# EAGLE board AutoSpielSimplified 3 FEDC DRU (EAGLE 9.2.0)
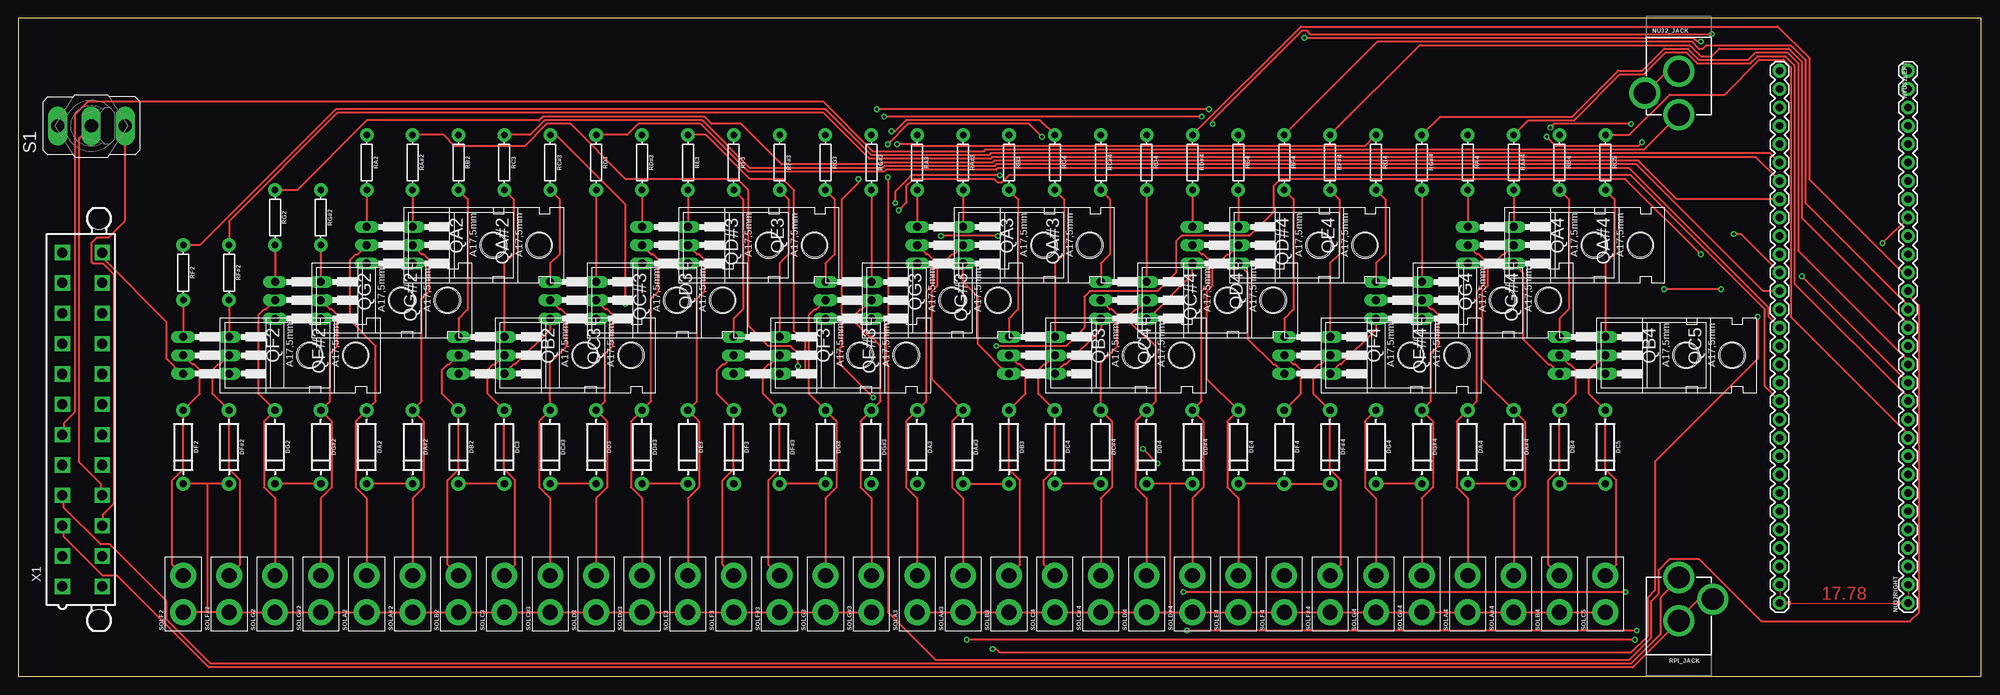
[diagram p0: board, top side]
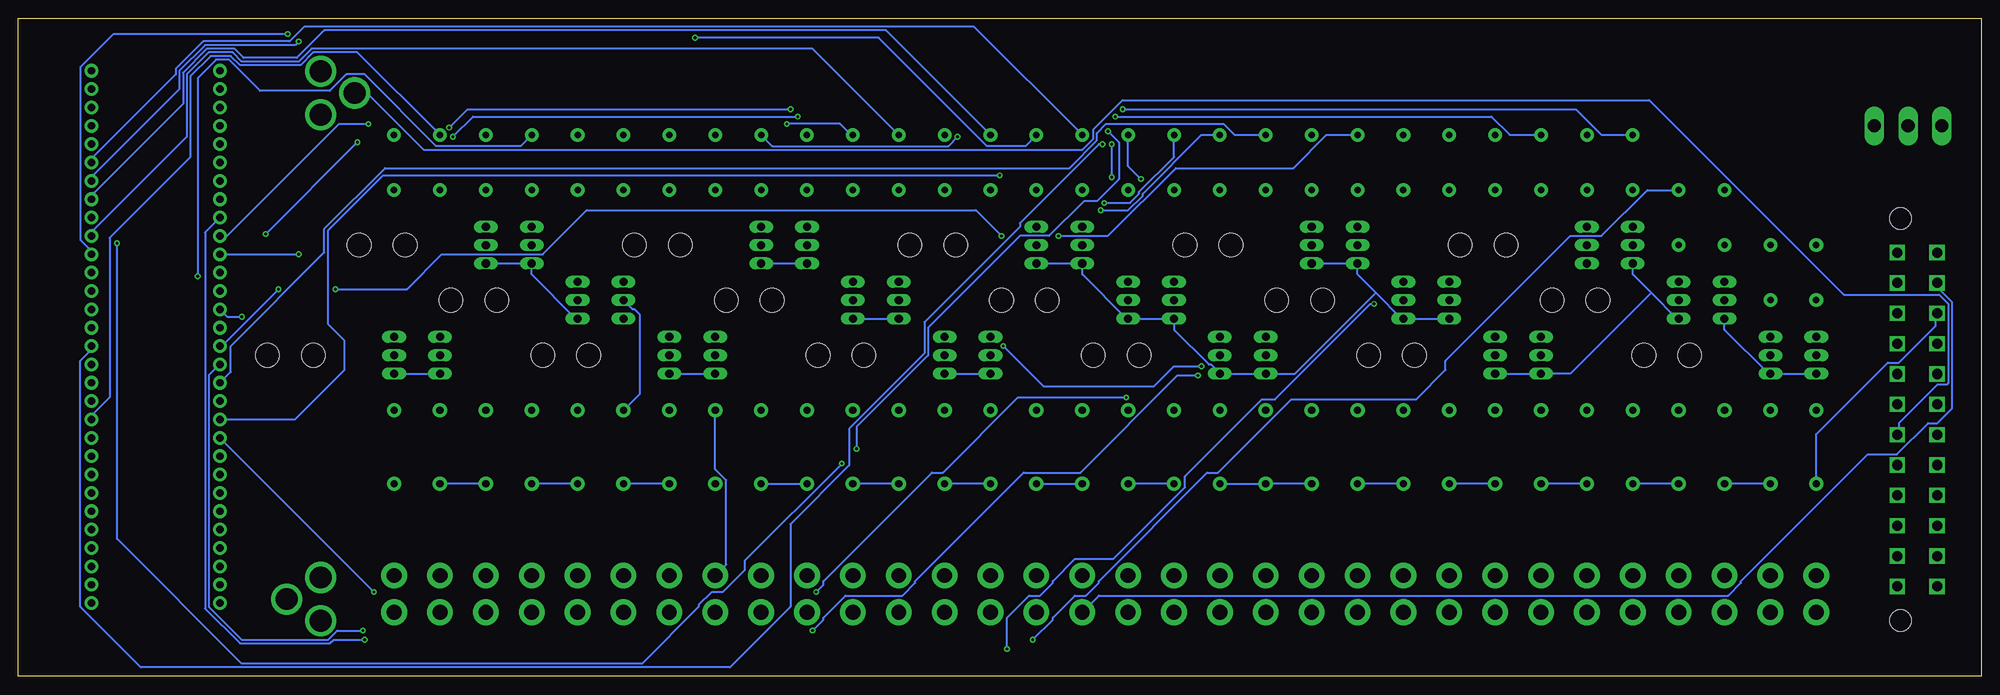
[diagram p1: board, bottom side, seen from below]

Size 271.76 x 91.11 mm. Coordinates in mm from the lower left corner, seen from the top.
Outline: 0,0 271.76,0 271.76,91.11 0,91.11 0,0
Copper layers (1*16): Top 0.035mm / dielectric 1.5mm / Bottom 0.035mm
Design rules "Standard": minimum track width 10mil, minimum drill 15mil, track to track 10mil, track to pad 10mil, pad to pad 10mil, via to via 10mil, smd to smd 10mil, copper to edge 40mil, drill to drill 10mil, minimum pad ring 8mil, minimum via ring 8mil, stop-mask expansion 4mil, vias tented up to drill 0mil, thermal gap 10mil

## Footprints (pad centres in the part's own frame; a part is rotated, then mirrored left to right if it is on the bottom)
DIODE-1N4001 = drill 1 pad 1.981: A -5.08,0; C 5.08,0
POWER_JACK_PTH = drill 2.997 pad 4.318: GND 0,7.7; GNDBREAK 4.7,10.7; PWR 0,13.7
1X30 = drill 1.016 pad 1.88: 1 0,0; 2 2.54,0; 3 5.08,0; 4 7.62,0; 5 10.16,0; 6 12.7,0; 7 15.24,0; 8 17.78,0; 9 20.32,0; 10 22.86,0; 11 25.4,0; 12 27.94,0; 13 30.48,0; 14 33.02,0; 15 35.56,0; 16 38.1,0; 17 40.64,0; 18 43.18,0; 19 45.72,0; 20 48.26,0; 21 50.8,0; 22 53.34,0; 23 55.88,0; 24 58.42,0; 25 60.96,0; 26 63.5,0; 27 66.04,0; 28 68.58,0; 29 71.12,0; 30 73.66,0
TO220AH = drill 1.118 long: B -2.54,-6.35; C 0,-6.35; E 2.54,-6.35 | hole 3.302: 0,11.176
AXIAL-0.3 = drill 0.9 pad 1.88: P$1 -3.81,0; P$2 3.81,0
M9040P = drill 1.803 long: 1 0,4.699; 2 0,0; 3 0,-4.699
1X02_XTRA_BIG = drill 2.057 pad 3.556: 1 -2.54,0; 2 2.54,0
5566-24 = drill 1.4 square: 1 23.1,-2.75; 2 18.9,-2.75; 3 14.7,-2.75; 4 10.5,-2.75; 5 6.3,-2.75; 6 2.1,-2.75; 7 -2.1,-2.75; 8 -6.3,-2.75; 9 -10.5,-2.75; 10 -14.7,-2.75; 11 -18.9,-2.75; 12 -23.1,-2.75; 13 23.1,2.75; 14 18.9,2.75; 15 14.7,2.75; 16 10.5,2.75; 17 6.3,2.75; 18 2.1,2.75; 19 -2.1,2.75; 20 -6.3,2.75; 21 -10.5,2.75; 22 -14.7,2.75; 23 -18.9,2.75; 24 -23.1,2.75 | hole 3: 27.8,2.29; -27.8,2.29

## Placement (x,y rotation side)
DA2  1A/50V/1.1V  [DIODE-1N4001]  48.26,31.75 270 top
DA3  1A/50V/1.1V  [DIODE-1N4001]  124.46,31.75 270 top
DA4  1A/50V/1.1V  [DIODE-1N4001]  200.66,31.75 270 top
DA#2  1A/50V/1.1V  [DIODE-1N4001]  54.61,31.75 270 top
DA#3  1A/50V/1.1V  [DIODE-1N4001]  130.81,31.75 270 top
DA#4  1A/50V/1.1V  [DIODE-1N4001]  207.01,31.75 270 top
DB2  1A/50V/1.1V  [DIODE-1N4001]  60.96,31.75 270 top
DB3  1A/50V/1.1V  [DIODE-1N4001]  137.16,31.75 270 top
DB4  1A/50V/1.1V  [DIODE-1N4001]  213.36,31.75 270 top
DC3  1A/50V/1.1V  [DIODE-1N4001]  67.31,31.75 270 top
DC4  1A/50V/1.1V  [DIODE-1N4001]  143.51,31.75 270 top
DC5  1A/50V/1.1V  [DIODE-1N4001]  219.71,31.75 270 top
DC#3  1A/50V/1.1V  [DIODE-1N4001]  73.66,31.75 270 top
DC#4  1A/50V/1.1V  [DIODE-1N4001]  149.86,31.75 270 top
DD3  1A/50V/1.1V  [DIODE-1N4001]  80.01,31.75 270 top
DD4  1A/50V/1.1V  [DIODE-1N4001]  156.21,31.75 270 top
DD#3  1A/50V/1.1V  [DIODE-1N4001]  86.36,31.75 270 top
DD#4  1A/50V/1.1V  [DIODE-1N4001]  162.56,31.75 270 top
DE3  1A/50V/1.1V  [DIODE-1N4001]  92.71,31.75 270 top
DE4  1A/50V/1.1V  [DIODE-1N4001]  168.91,31.75 270 top
DF2  1A/50V/1.1V  [DIODE-1N4001]  22.86,31.75 270 top
DF3  1A/50V/1.1V  [DIODE-1N4001]  99.06,31.75 270 top
DF4  1A/50V/1.1V  [DIODE-1N4001]  175.26,31.75 270 top
DF#2  1A/50V/1.1V  [DIODE-1N4001]  29.21,31.75 270 top
DF#3  1A/50V/1.1V  [DIODE-1N4001]  105.41,31.75 270 top
DF#4  1A/50V/1.1V  [DIODE-1N4001]  181.61,31.75 270 top
DG2  1A/50V/1.1V  [DIODE-1N4001]  35.56,31.75 270 top
DG3  1A/50V/1.1V  [DIODE-1N4001]  111.76,31.75 270 top
DG4  1A/50V/1.1V  [DIODE-1N4001]  187.96,31.75 270 top
DG#2  1A/50V/1.1V  [DIODE-1N4001]  41.91,31.75 270 top
DG#3  1A/50V/1.1V  [DIODE-1N4001]  118.11,31.75 270 top
DG#4  1A/50V/1.1V  [DIODE-1N4001]  194.31,31.75 270 top
NU32_JACK  POWER_JACK  [POWER_JACK_PTH]  229.87,91.44 180 top
NU32RIGHT  [1X30]  261.62,10.16 90 top
NYU32LEFT  [1X30]  243.84,10.16 90 top
QA2  TIP120  [TO220AH]  54.61,59.69 270 top
QA3  TIP120  [TO220AH]  130.81,59.69 270 top
QA4  TIP120  [TO220AH]  207.01,59.69 270 top
QA#2  TIP120  [TO220AH]  60.96,59.69 270 top
QA#3  TIP120  [TO220AH]  137.16,59.69 270 top
QA#4  TIP120  [TO220AH]  213.36,59.69 270 top
QB2  TIP120  [TO220AH]  67.31,44.45 270 top
QB3  TIP120  [TO220AH]  143.51,44.45 270 top
QB4  TIP120  [TO220AH]  219.71,44.45 270 top
QC3  TIP120  [TO220AH]  73.66,44.45 270 top
QC4  TIP120  [TO220AH]  149.86,44.45 270 top
QC5  TIP120  [TO220AH]  226.06,44.45 270 top
QC#3  TIP120  [TO220AH]  80.01,52.07 270 top
QC#4  TIP120  [TO220AH]  156.21,52.07 270 top
QD3  TIP120  [TO220AH]  86.36,52.07 270 top
QD4  TIP120  [TO220AH]  162.56,52.07 270 top
QD#3  TIP120  [TO220AH]  92.71,59.69 270 top
QD#4  TIP120  [TO220AH]  168.91,59.69 270 top
QE3  TIP120  [TO220AH]  99.06,59.69 270 top
QE4  TIP120  [TO220AH]  175.26,59.69 270 top
QF2  TIP120  [TO220AH]  29.21,44.45 270 top
QF3  TIP120  [TO220AH]  105.41,44.45 270 top
QF4  TIP120  [TO220AH]  181.61,44.45 270 top
QF#2  TIP120  [TO220AH]  35.56,44.45 270 top
QF#3  TIP120  [TO220AH]  111.76,44.45 270 top
QF#4  TIP120  [TO220AH]  187.96,44.45 270 top
QG2  TIP120  [TO220AH]  41.91,52.07 270 top
QG3  TIP120  [TO220AH]  118.11,52.07 270 top
QG4  TIP120  [TO220AH]  194.31,52.07 270 top
QG#2  TIP120  [TO220AH]  48.26,52.07 270 top
QG#3  TIP120  [TO220AH]  124.46,52.07 270 top
QG#4  TIP120  [TO220AH]  200.66,52.07 270 top
RA2  1k  [AXIAL-0.3]  48.26,71.12 270 top
RA3  1k  [AXIAL-0.3]  124.46,71.12 270 top
RA4  1k  [AXIAL-0.3]  200.66,71.12 270 top
RA#2  1k  [AXIAL-0.3]  54.61,71.12 270 top
RA#3  1k  [AXIAL-0.3]  130.81,71.12 270 top
RA#4  1k  [AXIAL-0.3]  207.01,71.12 270 top
RB2  1k  [AXIAL-0.3]  60.96,71.12 270 top
RB3  1k  [AXIAL-0.3]  137.16,71.12 270 top
RB4  1k  [AXIAL-0.3]  213.36,71.12 270 top
RC3  1k  [AXIAL-0.3]  67.31,71.12 270 top
RC4  1k  [AXIAL-0.3]  143.51,71.12 270 top
RC5  1k  [AXIAL-0.3]  219.71,71.12 270 top
RC#3  1k  [AXIAL-0.3]  73.66,71.12 270 top
RC#4  1k  [AXIAL-0.3]  149.86,71.12 270 top
RD3  1k  [AXIAL-0.3]  80.01,71.12 270 top
RD4  1k  [AXIAL-0.3]  156.21,71.12 270 top
RD#3  1k  [AXIAL-0.3]  86.36,71.12 270 top
RD#4  1k  [AXIAL-0.3]  162.56,71.12 270 top
RE3  1k  [AXIAL-0.3]  92.71,71.12 270 top
RE4  1k  [AXIAL-0.3]  168.91,71.12 270 top
RF2  1k  [AXIAL-0.3]  22.86,55.88 270 top
RF3  1k  [AXIAL-0.3]  99.06,71.12 270 top
RF4  1k  [AXIAL-0.3]  175.26,71.12 270 top
RF#2  1k  [AXIAL-0.3]  29.21,55.88 270 top
RF#3  1k  [AXIAL-0.3]  105.41,71.12 270 top
RF#4  1k  [AXIAL-0.3]  181.61,71.12 270 top
RG2  1k  [AXIAL-0.3]  35.56,63.5 270 top
RG3  1k  [AXIAL-0.3]  111.76,71.12 270 top
RG4  1k  [AXIAL-0.3]  187.96,71.12 270 top
RG#2  1k  [AXIAL-0.3]  41.91,63.5 270 top
RG#3  1k  [AXIAL-0.3]  118.11,71.12 270 top
RG#4  1k  [AXIAL-0.3]  194.31,71.12 270 top
RPI_JACK  POWER_JACK  [POWER_JACK_PTH]  229.87,0 0 top
S1  [M9040P]  10.16,76.2 90 top
SOLA2  [1X02_XTRA_BIG]  48.26,11.43 90 top
SOLA3  [1X02_XTRA_BIG]  124.46,11.43 90 top
SOLA4  [1X02_XTRA_BIG]  200.66,11.43 90 top
SOLA#2  [1X02_XTRA_BIG]  54.61,11.43 90 top
SOLA#3  [1X02_XTRA_BIG]  130.81,11.43 90 top
SOLA#4  [1X02_XTRA_BIG]  207.01,11.43 90 top
SOLB2  [1X02_XTRA_BIG]  60.96,11.43 90 top
SOLB3  [1X02_XTRA_BIG]  137.16,11.43 90 top
SOLB4  [1X02_XTRA_BIG]  213.36,11.43 90 top
SOLC3  [1X02_XTRA_BIG]  67.31,11.43 90 top
SOLC4  [1X02_XTRA_BIG]  143.51,11.43 90 top
SOLC5  [1X02_XTRA_BIG]  219.71,11.43 90 top
SOLC#3  [1X02_XTRA_BIG]  73.66,11.43 90 top
SOLC#4  [1X02_XTRA_BIG]  149.86,11.43 90 top
SOLD3  [1X02_XTRA_BIG]  80.01,11.43 90 top
SOLD4  [1X02_XTRA_BIG]  156.21,11.43 90 top
SOLD#3  [1X02_XTRA_BIG]  86.36,11.43 90 top
SOLD#4  [1X02_XTRA_BIG]  162.56,11.43 90 top
SOLE3  [1X02_XTRA_BIG]  92.71,11.43 90 top
SOLE4  [1X02_XTRA_BIG]  168.91,11.43 90 top
SOLF2  [1X02_XTRA_BIG]  22.86,11.43 90 top
SOLF3  [1X02_XTRA_BIG]  99.06,11.43 90 top
SOLF4  [1X02_XTRA_BIG]  175.26,11.43 90 top
SOLF#2  [1X02_XTRA_BIG]  29.21,11.43 90 top
SOLF#3  [1X02_XTRA_BIG]  105.41,11.43 90 top
SOLF#4  [1X02_XTRA_BIG]  181.61,11.43 90 top
SOLG2  [1X02_XTRA_BIG]  35.56,11.43 90 top
SOLG3  [1X02_XTRA_BIG]  111.76,11.43 90 top
SOLG4  [1X02_XTRA_BIG]  187.96,11.43 90 top
SOLG#2  [1X02_XTRA_BIG]  41.91,11.43 90 top
SOLG#3  [1X02_XTRA_BIG]  118.11,11.43 90 top
SOLG#4  [1X02_XTRA_BIG]  194.31,11.43 90 top
X1  5566-24  [5566-24]  8.89,35.56 270 top

## Library data of the parts
DA2-DA4 DA#2-DA#4 DB2-DB4 DC3-DC5 DC#3 DC#4 DD3 DD4 DD#3 DD#4 DE3 DE4 DF2-DF4 DF#2-DF#4 DG2-DG4 DG#2-DG#4 = SparkFun-DiscreteSemi; PROD_ID: DIO-09176
NU32_JACK RPI_JACK = SparkFun-Connectors; PROD_ID: CONN-08197
NU32RIGHT NYU32LEFT SOLA2-SOLA4 SOLA#2-SOLA#4 SOLB2-SOLB4 SOLC3-SOLC5 SOLC#3 SOLC#4 SOLD3 SOLD4 SOLD#3 SOLD#4 SOLE3 SOLE4 SOLF2-SOLF4 SOLF#2-SOLF#4 SOLG2-SOLG4 SOLG#2-SOLG#4 = SparkFun-Connectors
QA2-QA4 QA#2-QA#4 QB2-QB4 QC3-QC5 QC#3 QC#4 QD3 QD4 QD#3 QD#4 QE3 QE4 QF2-QF4 QF#2-QF#4 QG2-QG4 QG#2-QG#4 = transistor-power
RA2-RA4 RA#2-RA#4 RB2-RB4 RC3-RC5 RC#3 RC#4 RD3 RD4 RD#3 RD#4 RE3 RE4 RF2-RF4 RF#2-RF#4 RG2-RG4 RG#2-RG#4 = SparkFun-Resistors; PROD_ID: RES-08380
S1 = switch
X1 = con-molex; MF: MOLEX; OC_FARNELL: unknown; OC_NEWARK: unknown

## Nets
A2: NYU32LEFT.21 RA2.P$1
A3: NU32RIGHT.25 RA3.P$1
A4: NU32RIGHT.13 RA4.P$1
A#2: NYU32LEFT.20 RA#2.P$1
A#3: NU32RIGHT.24 RA#3.P$1
A#4: NU32RIGHT.12 RA#4.P$1
B2: NYU32LEFT.19 RB2.P$1
B3: NU32RIGHT.23 RB3.P$1
B4: NU32RIGHT.11 RB4.P$1
C3: NYU32LEFT.18 RC3.P$1
C4: NU32RIGHT.22 RC4.P$1
C5: NU32RIGHT.10 RC5.P$1
C#3: NYU32LEFT.17 RC#3.P$1
C#4: NU32RIGHT.21 RC#4.P$1
D3: NYU32LEFT.16 RD3.P$1
D4: NU32RIGHT.20 RD4.P$1
D#3: NYU32LEFT.15 RD#3.P$1
D#4: NU32RIGHT.19 RD#4.P$1
E3: NYU32LEFT.14 RE3.P$1
E4: NU32RIGHT.18 RE4.P$1
F2: NYU32LEFT.25 RF2.P$1
F3: NYU32LEFT.13 RF3.P$1
F4: NU32RIGHT.17 RF4.P$1
F#2: NYU32LEFT.24 RF#2.P$1
F#3: NYU32LEFT.12 RF#3.P$1
F#4: NU32RIGHT.16 RF#4.P$1
G2: NYU32LEFT.23 RG2.P$1
G3: NYU32LEFT.11 RG3.P$1
G4: NU32RIGHT.15 RG4.P$1
G#2: NYU32LEFT.22 RG#2.P$1
G#3: NYU32LEFT.10 RG#3.P$1
G#4: NU32RIGHT.14 RG#4.P$1
GND: QA2.E QA3.E QA4.E QA#2.E QA#3.E QA#4.E QB2.E QB3.E QB4.E QC3.E QC4.E QC5.E QC#3.E QC#4.E QD3.E QD4.E QD#3.E QD#4.E QE3.E QE4.E QF2.E QF3.E QF4.E QF#2.E QF#3.E QF#4.E QG2.E QG3.E QG4.E QG#2.E QG#3.E QG#4.E X1.24
N$1: QF2.B RF2.P$2
N$2: QC#3.B RC#3.P$2
N$3: DF2.A QF2.C SOLF2.2
N$4: QF#2.B RF#2.P$2
N$5: DF#2.A QF#2.C SOLF#2.2
N$6: DC#3.A QC#3.C SOLC#3.2
N$7: QG2.B RG2.P$2
N$8: DG2.A QG2.C SOLG2.2
N$9: QD3.B RD3.P$2
N$10: QG#2.B RG#2.P$2
N$11: DG#2.A QG#2.C SOLG#2.2
N$12: DD3.A QD3.C SOLD3.2
N$13: QA2.B RA2.P$2
N$14: DA2.A QA2.C SOLA2.2
N$15: QD#3.B RD#3.P$2
N$16: QA#2.B RA#2.P$2
N$17: DA#2.A QA#2.C SOLA#2.2
N$18: DD#3.A QD#3.C SOLD#3.2
N$19: QB2.B RB2.P$2
N$20: DB2.A QB2.C SOLB2.2
N$21: QE3.B RE3.P$2
N$22: QC3.B RC3.P$2
N$23: DC3.A QC3.C SOLC3.2
N$24: DE3.A QE3.C SOLE3.2
N$25: QA3.B RA3.P$2
N$26: DA3.A QA3.C SOLA3.2
N$27: QF3.B RF3.P$2
N$28: DF3.A QF3.C SOLF3.2
N$29: QF#3.B RF#3.P$2
N$30: DF#3.A QF#3.C SOLF#3.2
N$31: QG3.B RG3.P$2
N$32: DG3.A QG3.C SOLG3.2
N$33: QG#3.B RG#3.P$2
N$34: DG#3.A QG#3.C SOLG#3.2
N$35: QF4.B RF4.P$2
N$36: DF4.A QF4.C SOLF4.2
N$37: QF#4.B RF#4.P$2
N$38: DF#4.A QF#4.C SOLF#4.2
N$39: QG4.B RG4.P$2
N$40: DG4.A QG4.C SOLG4.2
N$41: QG#4.B RG#4.P$2
N$42: DG#4.A QG#4.C SOLG#4.2
N$43: QA4.B RA4.P$2
N$44: DA4.A QA4.C SOLA4.2
N$45: QA#4.B RA#4.P$2
N$46: DA#4.A QA#4.C SOLA#4.2
N$47: QB4.B RB4.P$2
N$48: DB4.A QB4.C SOLB4.2
N$49: QC5.B RC5.P$2
N$50: DC5.A QC5.C SOLC5.2
N$52: QA#3.B RA#3.P$2
N$53: DA#3.A QA#3.C SOLA#3.2
N$55: QB3.B RB3.P$2
N$56: DB3.A QB3.C SOLB3.2
N$57: S1.1
N$58: QC4.B RC4.P$2
N$59: DC4.A QC4.C SOLC4.2
N$61: QC#4.B RC#4.P$2
N$62: DC#4.A QC#4.C SOLC#4.2
N$64: QD4.B RD4.P$2
N$65: DD4.A QD4.C SOLD4.2
N$67: QD#4.B RD#4.P$2
N$68: DD#4.A QD#4.C SOLD#4.2
N$70: QE4.B RE4.P$2
N$71: DE4.A QE4.C SOLE4.2
NU32GND: NU32_JACK.GND NU32_JACK.GNDBREAK X1.18
NU32PWR: NU32_JACK.PWR X1.6
PS_ON: S1.2 X1.16
PS_ONGND: S1.3 X1.15
RPI_GND: RPI_JACK.GND RPI_JACK.GNDBREAK X1.3
RPI_PWR: RPI_JACK.PWR X1.4
VDD1: DA2.C DA#2.C DB2.C DC3.C DC#3.C DD3.C DD#3.C DE3.C DF2.C DF3.C DF#2.C DF#3.C DG2.C DG3.C DG#2.C DG#3.C SOLA2.1 SOLA#2.1 SOLB2.1 SOLC3.1 SOLC#3.1 SOLD3.1 SOLD#3.1 SOLE3.1 SOLF2.1 SOLF3.1 SOLF#2.1 SOLF#3.1 SOLG2.1 SOLG3.1 SOLG#2.1 SOLG#3.1 X1.10
VDD2: DA3.C DA4.C DA#3.C DA#4.C DB3.C DB4.C DC4.C DC5.C DC#4.C DD4.C DD#4.C DE4.C DF4.C DF#4.C DG4.C DG#4.C SOLA3.1 SOLA4.1 SOLA#3.1 SOLA#4.1 SOLB3.1 SOLB4.1 SOLC4.1 SOLC5.1 SOLC#4.1 SOLD4.1 SOLD#4.1 SOLE4.1 SOLF4.1 SOLF#4.1 SOLG4.1 SOLG#4.1 X1.11

## Tracks (layer width: path | path; a pad name or v marks a point on that pad's centre or on a via)
A2  (via drill 0.38)
  Top 0.254: v164.85,78.49 v118.87,78.49 | v212.09,75.95 212.6,76.45 v223.27,76.45
  Bottom 0.254: RA2.P$1 52.58,74.93 56.13,78.49 v118.87,78.49 | v164.85,78.49 209.55,78.49 v212.09,75.95 | v223.27,76.45 227.33,76.45 242.82,60.96 NYU32LEFT.21
A3
  Bottom 0.254: NU32RIGHT.25 261.62,71.63 249.94,83.31 249.94,84.07 246.13,87.88 234.19,87.88 232.16,89.92 139.45,89.92 RA3.P$1
A4  (via drill 0.38)
  Top 0.254: v246.89,55.37 NU32RIGHT.13
  Bottom 0.254: v246.89,55.37 246.89,82.8 244.35,85.34 242.57,85.34 238.25,81.03 228.6,81.03 226.31,83.31 223.77,83.31 213.87,73.41 202.18,73.41 RA4.P$1
A#2  (via drill 0.38)
  Top 0.254: RA#2.P$1 58.93,74.93 60.45,73.41 70.1,73.41 73.15,76.45 76.45,76.45 84.07,68.83 99.57,68.83 101.09,67.31 101.09,48.51 103.89,45.72 106.93,45.72 107.95,44.7 v107.95,42.93 | v135.38,45.72 145.03,45.72 147.57,48.26 147.57,52.58 148.34,53.34 157.73,53.34 160.27,55.88 160.27,60.2 161.04,60.96 170.43,60.96 173.74,64.26 173.74,67.82 174.75,68.83 222.5,68.83 v232.92,58.42
  Bottom 0.254: v107.95,42.93 111.76,42.93 114.55,40.13 129.79,40.13 v135.38,45.72 | NYU32LEFT.20 v232.92,58.42
A#3  (via drill 0.38)
  Top 0.254: v232.92,87.88 232.41,87.88 231.9,88.39 v178.05,88.39
  Bottom 0.254: NU32RIGHT.24 261.62,69.09 249.43,81.28 249.43,83.82 245.87,87.38 233.43,87.38 v232.92,87.88 | v178.05,88.39 152.65,88.39 137.67,73.41 132.33,73.41 RA#3.P$1
A#4
  Top 0.254: NU32RIGHT.12 261.62,38.61 245.87,54.36 245.87,84.58 244.6,85.85 240.79,85.85 239.78,84.84 232.41,84.84 230.89,86.36 228.09,86.36 225.04,83.31 221.74,83.31 215.39,76.96 209.04,76.96 RA#4.P$1
B2  (via drill 0.38)
  Top 0.254: v163.83,77.47 v119.89,77.47 | v211.58,74.68 212.85,73.41 224.28,73.41 v224.79,73.91 | v237.49,61.21 238.51,61.21 NYU32LEFT.19
  Bottom 0.254: RB2.P$1 65.28,74.93 67.82,77.47 v119.89,77.47 | v163.83,77.47 208.79,77.47 v211.58,74.68 | v237.49,61.21 v224.79,73.91
B3
  Bottom 0.254: NU32RIGHT.23 261.62,66.55 248.92,79.25 248.92,83.57 245.62,86.87 241.81,86.87 240.54,85.6 233.17,85.6 229.36,89.41 151.64,89.41 RB3.P$1
B4
  Bottom 0.254: NU32RIGHT.11 261.62,36.07 259.08,38.61 259.08,60.71 247.9,71.88 247.9,83.06 245.11,85.85 242.32,85.85 241.05,84.58 232.66,84.58 230.89,86.36 224.79,86.36 RB4.P$1
C3
  Top 0.254: RC3.P$1 70.87,74.93 72.9,76.96 94.74,76.96 101.35,70.36 119.63,70.36 119.89,70.61 135.13,70.61 135.38,70.87 224.03,70.87 241.55,53.34 NYU32LEFT.18
C4  (via drill 0.38)
  Top 0.254: v258.06,59.94 NU32RIGHT.22 | v155.7,31.5 v157.73,29.46 | v120.9,75.44 121.41,75.44 122.94,76.96 141.48,76.96 RC4.P$1
  Bottom 0.254: v258.06,59.94 258.06,19.05 240.79,1.78 185.42,1.78 177.55,9.65 177.55,9.91 175.77,11.68 174.24,11.68 171.2,14.73 171.2,16 v157.73,29.46 | v155.7,31.5 155.7,34.54 145.8,44.45 145.8,48.26 133.1,60.96 129.03,60.96 124.21,65.79 122.43,65.79 119.38,68.83 119.38,73.91 v120.9,75.44
C5
  Top 0.254: NU32RIGHT.10 261.62,33.53 245.36,49.78 245.36,84.33 244.35,85.34 241.05,85.34 236.22,80.52 228.6,80.52 223.01,74.93 RC5.P$1
C#3  (via drill 0.38)
  Top 0.254: RC#3.P$1 74.42,74.93 84.07,65.28 v84.07,51.56 | v134.87,3.81 135.38,3.81 135.89,3.3 223.27,3.3 225.55,5.59 225.55,10.92 226.57,11.94 226.57,29.72 240.79,43.94 v240.79,49.78
  Bottom 0.254: v84.07,51.56 84.58,51.56 97.79,38.35 99.57,38.35 110.24,27.69 110.24,26.16 120.14,16.26 125.48,16.26 128.52,13.21 128.52,12.95 130.3,11.18 131.83,11.18 134.87,8.13 v134.87,3.81 | v240.79,49.78 242.82,49.78 NYU32LEFT.17
C#4
  Bottom 0.254: NU32RIGHT.21 261.62,61.47 248.41,74.68 248.41,83.31 245.36,86.36 242.06,86.36 240.79,85.09 232.92,85.09 231.14,86.87 161.8,86.87 RC#4.P$1
D3
  Top 0.254: RD3.P$1 84.33,74.93 85.85,76.45 94.49,76.45 101.09,69.85 119.89,69.85 120.14,70.1 135.38,70.1 135.64,70.36 223.01,70.36 242.32,51.05 242.32,49.78 NYU32LEFT.16
D4  (via drill 0.38)
  Top 0.254: v234.44,88.9 178.82,88.9 178.31,89.41 177.8,89.41 165.35,76.96 v165.35,76.45
  Bottom 0.254: NU32RIGHT.20 261.62,58.93 263.14,60.45 263.14,84.33 258.57,88.9 v234.44,88.9 | v165.35,76.45 157.99,76.45 156.46,74.93 RD4.P$1
D#3  (via drill 0.38)
  Top 0.254: v135.64,60.96 v127.76,60.96 | v235.71,53.59 v227.84,53.59
  Bottom 0.254: RD#3.P$1 90.68,74.93 95.25,70.36 111.51,70.36 120.9,60.96 v127.76,60.96 | v135.64,60.96 139.19,64.52 193.04,64.52 199.14,58.42 213.11,58.42 217.93,53.59 v227.84,53.59 | v235.71,53.59 243.59,45.72 NYU32LEFT.15
D#4
  Top 0.254: NU32RIGHT.19 260.86,55.88 247.9,68.83 247.9,85.6 243.59,89.92 177.55,89.92 RD#4.P$1
E3  (via drill 0.38)
  Top 0.254: RE3.P$1 95.25,74.93 101.35,68.83 105.92,68.83 107.44,67.31 107.44,47.75 108.97,46.23 108.97,42.16 v108.46,41.66 | v224.03,6.35 v161.8,6.35
  Bottom 0.254: v108.46,41.66 111.25,41.66 124.71,28.19 132.59,28.19 147.57,13.21 147.57,12.95 149.35,11.18 157.23,11.18 160.27,8.13 160.27,7.87 v161.8,6.35 | v224.03,6.35 227.58,6.35 228.85,5.08 240.79,5.08 245.36,9.65 245.36,41.66 NYU32LEFT.14
E4  (via drill 0.38)
  Top 0.254: NU32RIGHT.18 261.62,52.83 263.14,51.31 263.14,8.89 261.87,7.62 241.3,7.62 232.66,16.26 228.6,16.26 227.08,14.73 227.08,11.43 226.06,10.41 226.06,5.33 223.01,2.29 127,2.29 120.4,8.89 120.4,43.18 120.14,43.43 120.14,48.77 120.4,49.02 v120.4,69.09 | v120.4,73.66 123.19,76.45 139.95,76.45 v141.73,74.68
  Bottom 0.254: v120.4,73.66 v120.4,69.09 | v141.73,74.68 143,73.41 167.39,73.41 RE4.P$1
F2
  Top 0.254: RF2.P$1 25.15,59.69 43.94,78.49 111.76,78.49 118.11,72.14 134.37,72.14 134.62,72.39 242.57,72.39 NYU32LEFT.25
F3
  Bottom 0.254: RF3.P$1 103.38,74.93 104.9,76.45 121.16,76.45 122.43,75.18 122.43,74.17 126.24,70.36 220.98,70.36 229.36,61.98 229.36,58.67 242.32,45.72 242.32,42.16 NYU32LEFT.13
F4
  Top 0.254: NU32RIGHT.17 261.62,51.31 247.4,65.53 247.4,85.34 245.36,87.38 233.68,87.38 233.17,86.87 232.66,86.87 231.65,87.88 188.21,87.88 RF4.P$1
F#2
  Top 0.254: RF#2.P$1 29.21,62.99 44.2,77.98 111.51,77.98 117.86,71.63 134.62,71.63 134.87,71.88 240.54,71.88 NYU32LEFT.24
F#3  (via drill 0.38)
  Top 0.254: v121.92,64.52 122.94,65.53 122.94,67.82 123.95,68.83 135.13,68.83 135.64,68.33 136.14,68.33 137.16,69.34 223.27,69.34 241.81,50.8 241.81,40.13 NYU32LEFT.12
  Bottom 0.254: RF#3.P$1 107.95,74.93 116.08,66.8 116.08,66.55 118.11,64.52 v121.92,64.52
F#4
  Top 0.254: NU32RIGHT.16 261.62,48.77 246.89,63.5 246.89,85.09 245.11,86.87 235.46,86.87 234.44,85.85 232.92,85.85 231.39,87.38 194.06,87.38 RF#4.P$1
G2
  Top 0.254: RG2.P$1 38.61,67.31 48.26,76.96 72.14,76.96 72.64,77.47 95,77.47 96.01,76.45 100.08,76.45 105.66,70.87 119.38,70.87 119.63,71.12 134.87,71.12 135.13,71.37 224.28,71.37 229.62,66.04 NYU32LEFT.23
G3  (via drill 0.38)
  Top 0.254: v121.41,65.53 121.41,67.06 123.7,69.34 v135.89,69.34
  Bottom 0.254: RG3.P$1 111.76,71.88 116.59,67.06 116.59,66.8 117.86,65.53 v121.41,65.53 | v135.89,69.34 221.23,69.34 228.85,61.72 228.85,48.77 226.57,46.48 226.57,42.42 233.43,35.56 NYU32LEFT.11
G4  (via drill 0.38)
  Top 0.254: v121.67,73.66 123.7,73.66 123.95,73.41 186.44,73.41 RG4.P$1
  Bottom 0.254: NU32RIGHT.15 261.62,45.21 263.14,43.69 263.14,9.65 254.76,1.27 173.23,1.27 164.85,9.65 164.85,21.08 156.72,29.21 156.72,34.29 146.3,44.7 146.3,49.02 133.1,62.23 133.1,62.74 122.17,73.66 v121.67,73.66
G#2  (via drill 0.38)
  Top 0.254: v223.77,5.08 v131.32,5.08
  Bottom 0.254: RG#2.P$1 46.23,67.31 52.58,60.96 56.9,60.96 74.17,43.69 74.17,42.42 78.23,38.35 95.5,38.35 105.66,28.19 107.19,28.19 122.17,13.21 122.17,12.95 123.95,11.18 125.48,11.18 128.52,8.13 128.52,7.87 v131.32,5.08 | v223.77,5.08 228.09,5.08 228.6,4.57 241.05,4.57 245.87,9.4 245.87,61.47 NYU32LEFT.22
G#3  (via drill 0.38)
  Top 0.254: v116.33,68.83 116.33,68.33 114.05,66.04 114.05,45.72 113.79,45.47 113.79,43.18 v118.36,38.61 | v222.5,11.68 v161.29,11.68
  Bottom 0.254: RG#3.P$1 118.11,70.61 v116.33,68.83 | v118.36,38.61 133.35,38.61 143.76,28.19 145.29,28.19 160.27,13.21 160.27,12.7 v161.29,11.68 | NYU32LEFT.10 v222.5,11.68
G#4
  Top 0.254: NU32RIGHT.14 261.62,43.69 246.38,58.93 246.38,84.84 244.86,86.36 240.54,86.36 239.52,85.34 232.66,85.34 231.14,86.87 227.84,86.87 224.79,83.82 221.49,83.82 215.14,77.47 196.85,77.47 RG#4.P$1
GND
  Top 0.254: QC3.E 68.58,43.18 68.83,43.18 73.66,48.01 QC#3.E | QA#2.E QA2.E | QG#2.E QG2.E | QF2.E 22.61,41.91 20.57,43.94 20.57,49.02 11.68,57.91 11.68,58.42 X1.24 | QG#4.E QG4.E 187.96,48.01 183.13,43.18 182.88,43.18 QF#4.E | QB4.E 212.09,43.18 211.84,43.18 208.28,46.74 208.28,55.88 QA#4.E | QC4.E 144.78,43.18 145.03,43.18 149.86,48.01 QC#4.E | QD#4.E 162.56,55.63 156.46,49.53 QD4.E | QA#3.E 130.81,54.61 132.84,52.58 132.84,45.97 136.91,41.91 QB3.E | QF4.E 173.99,43.18 173.74,43.18 170.18,46.74 170.18,55.88 QE4.E
  Bottom 0.254: QE3.E QD#3.E 86.36,55.63 83.82,53.09 | QC3.E QB2.E 56.9,41.91 45.72,53.09 | QC#3.E QD3.E 80.26,49.53 83.82,53.09 | QF2.E QF#2.E 29.46,41.91 35.56,48.01 QG2.E | QA2.E 48.26,55.63 45.72,53.09 | 45.72,53.09 42.16,49.53 QG#2.E | QC5.E QB4.E | QA#4.E QA4.E 200.66,55.63 194.56,49.53 QG#4.E | QF#4.E QF4.E | QA#3.E QA3.E 124.46,55.63 118.36,49.53 QG#3.E QG3.E 111.76,48.01 106.93,43.18 106.68,43.18 QF#3.E QF3.E 95,41.91 83.82,53.09 | QE4.E QD#4.E | QC4.E QB3.E | QD4.E QC#4.E
N$1
  Top 0.254: RF2.P$2 QF2.B
N$2
  Top 0.254: QC#3.B 73.66,57.15 74.93,58.42 74.93,66.04 RC#3.P$2
N$3
  Top 0.254: QF2.C 24.13,43.18 24.38,43.18 25.15,42.42 25.15,39.12 DF2.A 22.86,28.7 21.34,27.18 21.34,15.49 SOLF2.2
N$4
  Top 0.254: RF#2.P$2 QF#2.B
N$5
  Top 0.254: QF#2.C 27.94,43.18 27.69,43.18 26.92,42.42 26.92,39.12 DF#2.A 29.21,28.7 30.73,27.18 30.73,15.49 SOLF#2.2
N$6
  Top 0.254: QC#3.C 74.93,50.8 75.18,50.8 75.95,50.04 75.95,45.72 73.66,43.43 DC#3.A 72.14,35.31 72.14,26.16 73.66,24.64 SOLC#3.2
N$7
  Top 0.254: RG2.P$2 QG2.B
N$8
  Top 0.254: QG2.C 34.29,50.8 34.04,50.8 33.27,50.04 33.27,39.12 DG2.A 34.04,35.31 34.04,26.16 35.56,24.64 SOLG2.2
N$9
  Top 0.254: RD3.P$2 QD3.B
N$10
  Top 0.254: RG#2.P$2 QG#2.B
N$11
  Top 0.254: QG#2.C 43.18,50.8 43.43,50.8 44.2,50.04 44.2,45.72 43.18,44.7 43.18,38.1 DG#2.A 43.43,35.31 43.43,26.16 41.91,24.64 SOLG#2.2
N$12
  Top 0.254: QD3.C 81.28,50.8 81.53,50.8 82.3,50.04 82.3,45.72 81.28,44.7 81.28,38.1 DD3.A 81.53,35.31 81.53,26.16 80.01,24.64 SOLD3.2
N$13
  Top 0.254: RA2.P$2 QA2.B
N$14
  Top 0.254: QA2.C 46.99,58.42 46.74,58.42 45.97,57.66 45.97,49.28 49.53,45.72 49.53,38.1 DA2.A 46.74,35.31 46.74,26.16 48.26,24.64 SOLA2.2
N$15
  Top 0.254: RD#3.P$2 QD#3.B
N$16
  Top 0.254: RA#2.P$2 QA#2.B
N$17
  Top 0.254: QA#2.C 55.88,58.42 56.13,58.42 56.9,57.66 56.9,53.34 55.88,52.32 55.88,38.1 DA#2.A 56.13,35.31 56.13,26.16 54.61,24.64 SOLA#2.2
N$18
  Top 0.254: QD#3.C 87.63,58.42 87.88,58.42 88.65,57.66 88.65,53.34 87.63,52.32 87.63,38.1 DD#3.A 84.84,35.31 84.84,26.16 86.36,24.64 SOLD#3.2
N$19
  Top 0.254: QB2.B 60.96,49.53 62.23,50.8 62.23,66.04 RB2.P$2
N$20
  Top 0.254: QB2.C 59.69,43.18 59.44,43.18 58.67,42.42 58.67,39.12 DB2.A 60.96,28.7 59.44,27.18 59.44,15.49 SOLB2.2
N$21
  Top 0.254: RE3.P$2 QE3.B
N$22
  Top 0.254: QC3.B 67.31,57.15 68.58,58.42 68.58,66.04 RC3.P$2
N$23
  Top 0.254: QC3.C 66.04,43.18 65.79,43.18 65.02,42.42 65.02,39.12 DC3.A 67.31,28.7 68.83,27.18 68.83,15.49 SOLC3.2
N$24
  Top 0.254: QE3.C 93.98,58.42 94.23,58.42 95,57.66 95,53.34 93.98,52.32 93.98,38.1 DE3.A 94.23,35.31 94.23,26.16 92.71,24.64 SOLE3.2
N$25
  Top 0.254: RA3.P$2 QA3.B
N$26
  Top 0.254: QA3.C 125.73,58.42 125.98,58.42 126.75,57.66 126.75,54.36 125.73,53.34 125.73,38.1 DA3.A 122.94,35.31 122.94,26.16 124.46,24.64 SOLA3.2
N$27
  Top 0.254: QF3.B 99.06,49.53 100.33,50.8 100.33,66.04 RF3.P$2
N$28
  Top 0.254: QF3.C 97.79,43.18 97.54,43.18 96.77,42.42 96.77,39.12 DF3.A 99.06,28.7 97.54,27.18 97.54,15.49 SOLF3.2
N$29
  Top 0.254: QF#3.B 105.41,57.15 106.68,58.42 106.68,66.04 RF#3.P$2
N$30
  Top 0.254: QF#3.C 104.14,43.18 103.89,43.18 103.12,42.42 103.12,39.12 DF#3.A 105.41,28.7 103.89,27.18 103.89,15.49 SOLF#3.2
N$31
  Top 0.254: QG3.B 111.76,57.15 113.03,58.42 113.03,66.04 RG3.P$2
N$32
  Top 0.254: QG3.C 110.49,50.8 110.24,50.8 109.47,50.04 109.47,39.12 DG3.A 113.28,35.31 113.28,26.16 111.76,24.64 SOLG3.2
N$33
  Top 0.254: RG#3.P$2 QG#3.B
N$34
  Top 0.254: QG#3.C 116.84,50.8 116.59,50.8 115.82,50.04 115.82,49.02 117.86,46.99 118.11,46.99 119.38,45.72 119.38,38.1 DG#3.A 116.59,35.31 116.59,26.16 118.11,24.64 SOLG#3.2
N$35
  Top 0.254: QF4.B 175.26,49.53 176.53,50.8 176.53,66.04 RF4.P$2
N$36
  Top 0.254: QF4.C 176.53,43.18 176.78,43.18 177.55,42.42 177.55,39.12 DF4.A
  Bottom 0.254: DF4.A 175.26,28.7 173.74,27.18 173.74,15.49 SOLF4.2
N$37
  Top 0.254: QF#4.B 181.61,57.15 182.88,58.42 182.88,66.04 RF#4.P$2
N$38
  Top 0.254: QF#4.C 180.34,43.18 180.09,43.18 179.32,42.42 179.32,39.12 DF#4.A 181.61,28.7 183.13,27.18 183.13,15.49 SOLF#4.2
N$39
  Top 0.254: QG4.B 187.96,57.15 189.23,58.42 189.23,66.04 RG4.P$2
N$40
  Top 0.254: SOLG4.2 187.96,24.64 186.44,26.16 186.44,35.31 DG4.A
  Bottom 0.254: QG4.C 186.69,50.8 186.44,50.8 185.67,50.04 185.67,39.12 DG4.A
N$41
  Top 0.254: RG#4.P$2 QG#4.B
N$42
  Top 0.254: QG#4.C 195.58,50.8 195.83,50.8 196.6,50.04 196.6,45.72 195.58,44.7 195.58,38.1 DG#4.A 195.83,35.31 195.83,26.16 194.31,24.64 SOLG#4.2
N$43
  Top 0.254: RA4.P$2 QA4.B
N$44
  Top 0.254: QA4.C 201.93,58.42 202.18,58.42 202.95,57.66 202.95,54.36 201.93,53.34 201.93,38.1 DA4.A 199.14,35.31 199.14,26.16 200.66,24.64 SOLA4.2
N$45
  Top 0.254: RA#4.P$2 QA#4.B
N$46
  Top 0.254: QA#4.C 205.74,58.42 205.49,58.42 203.45,56.39 203.45,54.1 202.69,53.34 202.69,41.15 DA#4.A 208.53,35.31 208.53,26.16 207.01,24.64 SOLA#4.2
N$47
  Top 0.254: QB4.B 213.36,49.53 214.63,50.8 214.63,66.04 RB4.P$2
N$48
  Top 0.254: QB4.C 214.63,43.18 214.88,43.18 215.65,42.42 215.65,39.12 DB4.A 213.36,28.7 211.84,27.18 211.84,15.49 SOLB4.2
N$49
  Top 0.254: QC5.B 219.71,57.15 220.98,58.42 220.98,66.04 RC5.P$2
N$50
  Top 0.254: QC5.C 218.44,43.18 218.19,43.18 217.42,42.42 217.42,39.12 DC5.A 219.71,28.7 221.23,27.18 221.23,15.49 SOLC5.2
N$52
  Top 0.254: RA#3.P$2 QA#3.B
N$53
  Top 0.254: QA#3.C 129.54,58.42 129.29,58.42 127.25,56.39 127.25,54.1 126.49,53.34 126.49,41.15 DA#3.A 129.29,35.31 129.29,26.16 130.81,24.64 SOLA#3.2
N$55
  Top 0.254: QB3.B 137.16,49.53 138.43,50.8 138.43,66.04 RB3.P$2
N$56
  Top 0.254: QB3.C 138.43,43.18 138.68,43.18 139.45,42.42 139.45,39.12 DB3.A 137.16,28.7 138.68,27.18 138.68,15.49 SOLB3.2
N$58
  Top 0.254: QC4.B 143.51,57.15 144.78,58.42 144.78,66.04 RC4.P$2
N$59
  Top 0.254: QC4.C 142.24,43.18 141.99,43.18 141.22,42.42 141.22,39.12 DC4.A 143.51,28.7 141.99,27.18 141.99,15.49 SOLC4.2
N$61
  Top 0.254: QC#4.B 149.86,57.15 151.13,58.42 151.13,66.04 RC#4.P$2
N$62
  Top 0.254: QC#4.C 151.13,50.8 151.38,50.8 152.15,50.04 152.15,45.72 149.86,43.43 DC#4.A 151.38,35.31 151.38,26.16 149.86,24.64 SOLC#4.2
N$64
  Top 0.254: RD4.P$2 QD4.B
N$65
  Top 0.254: QD4.C 154.94,50.8 154.69,50.8 153.92,50.04 153.92,49.02 155.96,46.99 156.21,46.99 157.48,45.72 157.48,38.1 DD4.A 154.69,35.31 154.69,26.16 156.21,24.64 SOLD4.2
N$67
  Top 0.254: RD#4.P$2 QD#4.B
N$68
  Top 0.254: QD#4.C 163.83,58.42 164.08,58.42 164.85,57.66 164.85,54.36 163.83,53.34 163.83,38.1 DD#4.A 164.08,35.31 164.08,26.16 162.56,24.64 SOLD#4.2
N$70
  Top 0.254: RE4.P$2 QE4.B
N$71
  Top 0.254: QE4.C 167.64,58.42 167.39,58.42 165.35,56.39 165.35,54.1 164.59,53.34 164.59,41.15 DE4.A 167.39,35.31 167.39,26.16 168.91,24.64 SOLE4.2
NU32GND
  Top 0.254: NU32_JACK.GND 229.87,83.57 228.09,83.57 225.3,80.77 NU32_JACK.GNDBREAK
  Bottom 0.254: X1.18 11.43,33.53 11.43,35.05 6.1,40.39 4.83,40.39 4.57,40.64 4.57,51.56 5.84,52.83 19.05,52.83 45.97,79.76 118.87,79.76 122.94,75.69 122.94,74.42 124.46,72.9 215.65,72.9 223.27,80.52 225.04,80.52 NU32_JACK.GNDBREAK
NU32PWR
  Top 0.254: X1.6 6.35,33.53 6.35,35.05 7.87,36.58 7.87,77.72 9.65,79.5 111.51,79.5 118.36,72.64 133.6,72.64 133.86,72.9 225.04,72.9 229.87,77.72 NU32_JACK.PWR
PS_ON
  Top 0.254: S1.2 8.38,74.42 8.38,29.72 11.43,26.67 11.43,25.15 X1.16
PS_ONGND
  Top 0.254: X1.15 11.68,21.08 11.68,22.35 13.21,23.88 13.21,55.63 11.68,57.15 10.41,57.15 10.16,57.4 10.16,59.94 10.92,60.71 12.45,60.71 14.73,62.99 14.73,76.2 S1.3
RPI_GND
  Top 0.254: X1.3 6.35,20.83 6.35,19.3 11.68,13.97 13.72,13.97 26.42,1.27 223.52,1.27 229.87,7.62 RPI_JACK.GND 229.87,7.87 232.66,10.67 234.44,10.67 RPI_JACK.GNDBREAK
RPI_PWR
  Top 0.254: X1.4 6.35,24.89 6.35,23.37 11.43,18.29 12.7,18.29 20.57,10.41 20.57,7.87 26.67,1.78 223.27,1.78 227.33,5.84 227.33,10.92 229.87,13.46 RPI_JACK.PWR
VDD1
  Top 0.254: 26.16,8.89 SOLF#2.1 SOLG2.1 SOLG#2.1 SOLA2.1 SOLA#2.1 SOLB2.1 SOLC3.1 SOLC#3.1 SOLD3.1 SOLD#3.1 SOLE3.1 SOLF3.1 SOLF#3.1 SOLG3.1 SOLG#3.1 | 26.16,8.89 SOLF2.1 | DE3.C DD#3.C | DG3.C DF#3.C | DD3.C DC#3.C | DC3.C DB2.C | DA#2.C DA2.C | DG#2.C DG2.C | DF#2.C 26.16,26.67 | 26.16,26.67 DF2.C | 26.16,26.67 26.16,8.89
  Bottom 0.254: DE3.C DF3.C DF#3.C | DG3.C DG#3.C | DF2.C 22.86,33.53 12.95,43.43 11.43,43.43 6.35,48.51 6.35,50.04 X1.10 | DF#2.C DG2.C | DG#2.C DA2.C | DA#2.C DB2.C | DC3.C DC#3.C | DD3.C DD#3.C
VDD2
  Top 0.254: DD#4.C 159.51,26.67 | 159.51,26.67 DD4.C | DC#4.C DC4.C | DA#3.C DB3.C | DC5.C DB4.C | DA#4.C DA4.C | DG#4.C DG4.C | DE4.C DF4.C DF#4.C | SOLA3.1 SOLA#3.1 SOLB3.1 SOLC4.1 SOLC#4.1 SOLD4.1 159.51,8.89 | 159.51,8.89 SOLD#4.1 SOLE4.1 SOLF4.1 SOLF#4.1 SOLG4.1 SOLG#4.1 SOLA4.1 SOLA#4.1 SOLB4.1 SOLC5.1 | 159.51,8.89 159.51,26.67
  Bottom 0.254: DA#3.C DA3.C | DB3.C DC4.C | DC#4.C DD4.C | DF#4.C DG4.C | DG#4.C DA4.C | DA#4.C DB4.C | DE4.C DD#4.C | SOLA3.1 122.17,11.18 35.05,11.18 33.27,12.95 33.27,13.21 15.75,30.73 11.68,30.73 7.37,35.05 6.1,35.05 4.06,37.08 4.06,51.82 6.1,53.85 6.1,54.36 X1.11
(copper drawn outside any net)
  shapes: Top area x1

## Text on the board
Document: OFF | ON | AUTOSPIEL v1.1b | Designer: Jonathan Westerfield '19 | NU32_PWR | F2 | A3 | F#2 | A#3 | G2 | B3 | G#2 | C4 | A2 | C#4 | A#2 | D4 | B2 | D#4 | C3 | E4 | C#3 | F4 | D3 | F#4 | D#3 | G4 | E3 | G#4 | PSU_PWR_CONN | F3 | A4 | F#3 | A#4 | G3 | B4 | G#3 | C5 | F2 | F#2 | G2 | G#2 | A2 | A#2 | B2 | C3 | C#3 | D3 | D#3 | E3 | F3 | F#3 | G3 | G#3 | A3 | A#3 | B3 | C4 | C#4 | D4 | D#4 | E4 | F4 | F#4 | G4 | G#4 | A4 | A#4 | B4 | C5 | RPI_PWR